# Allegro board ir_pcb_back-dvt-0514pm14.brd
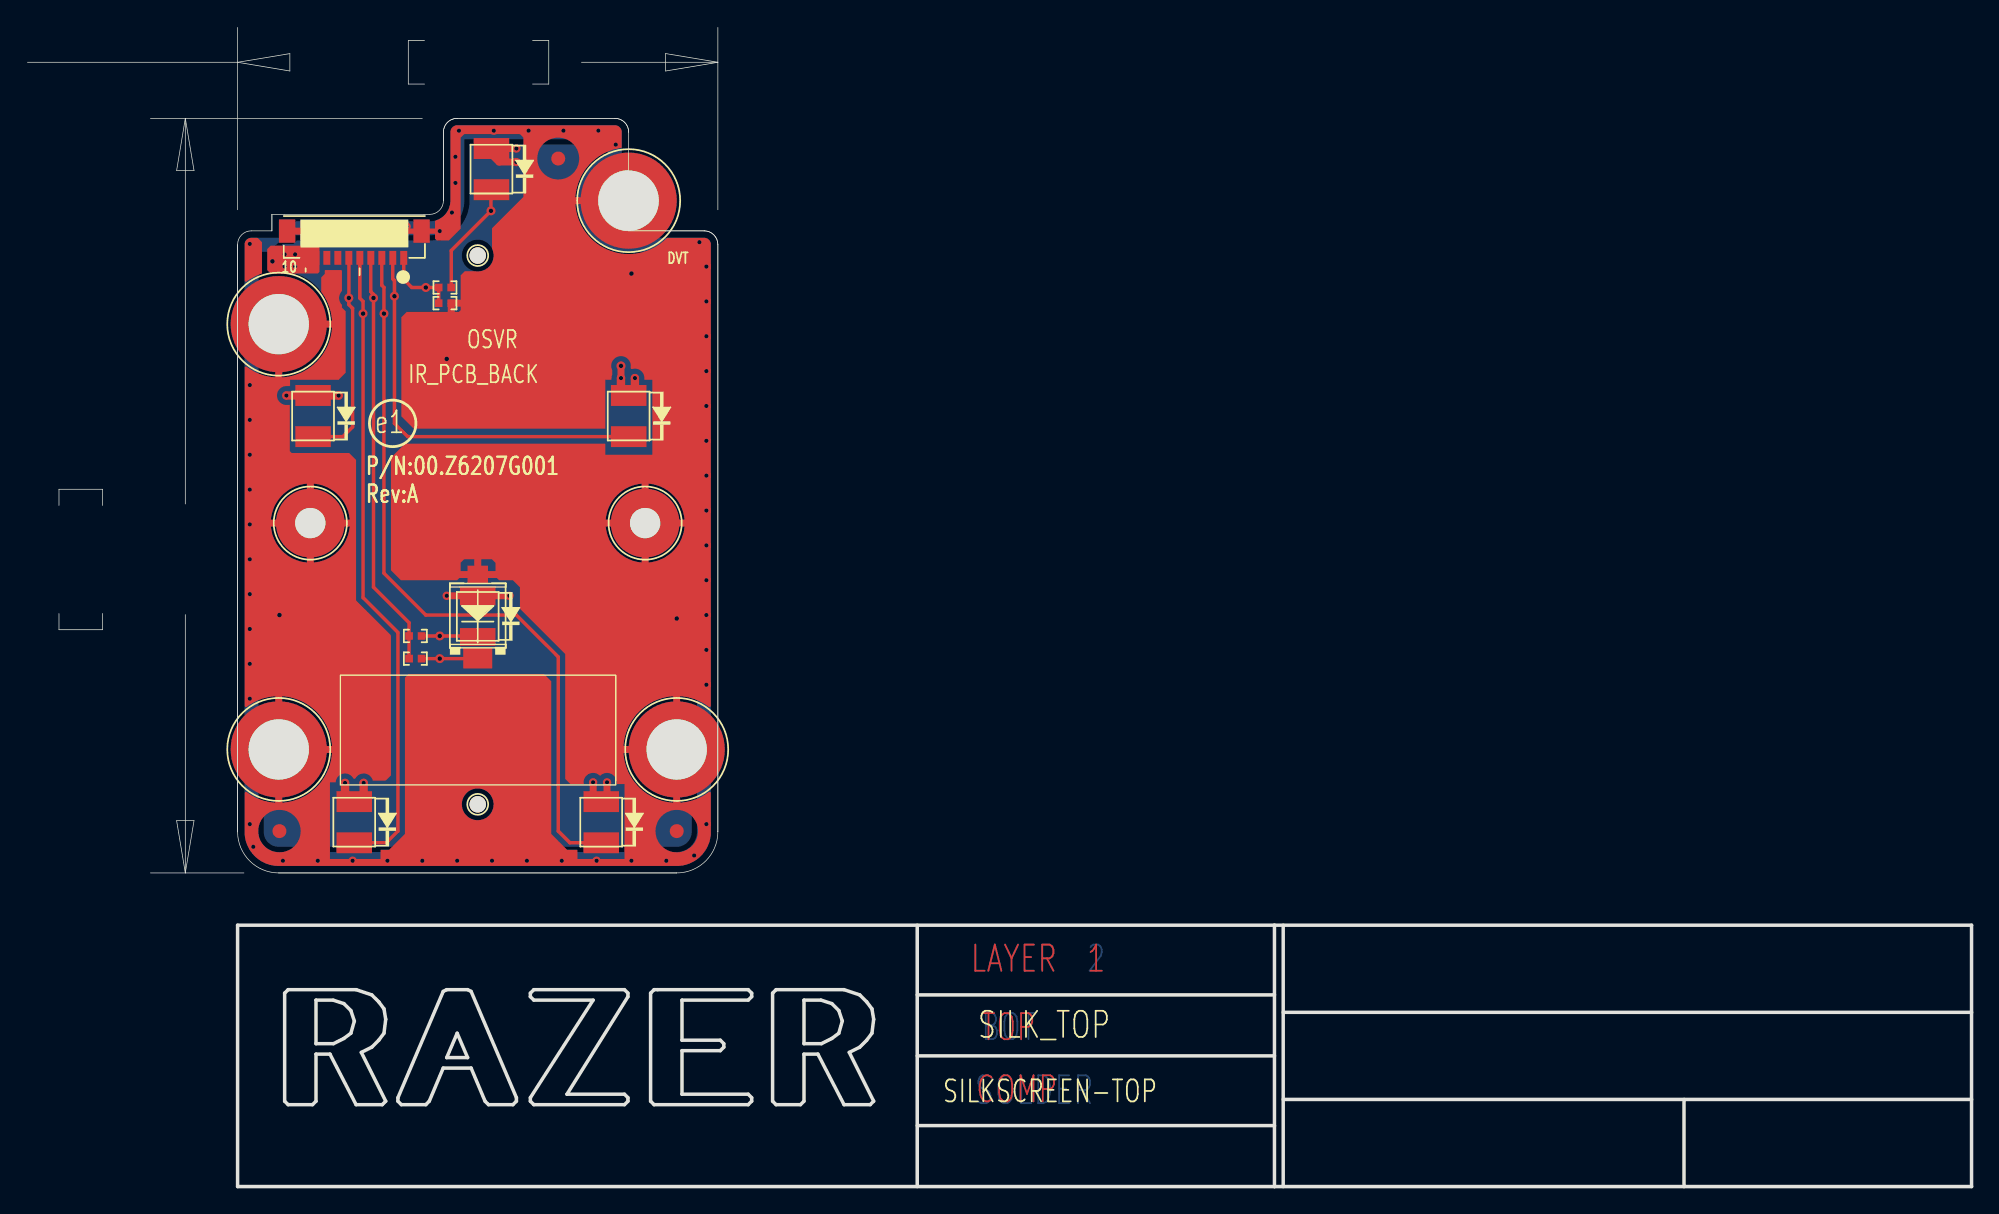
[diagram p0: board, top side]
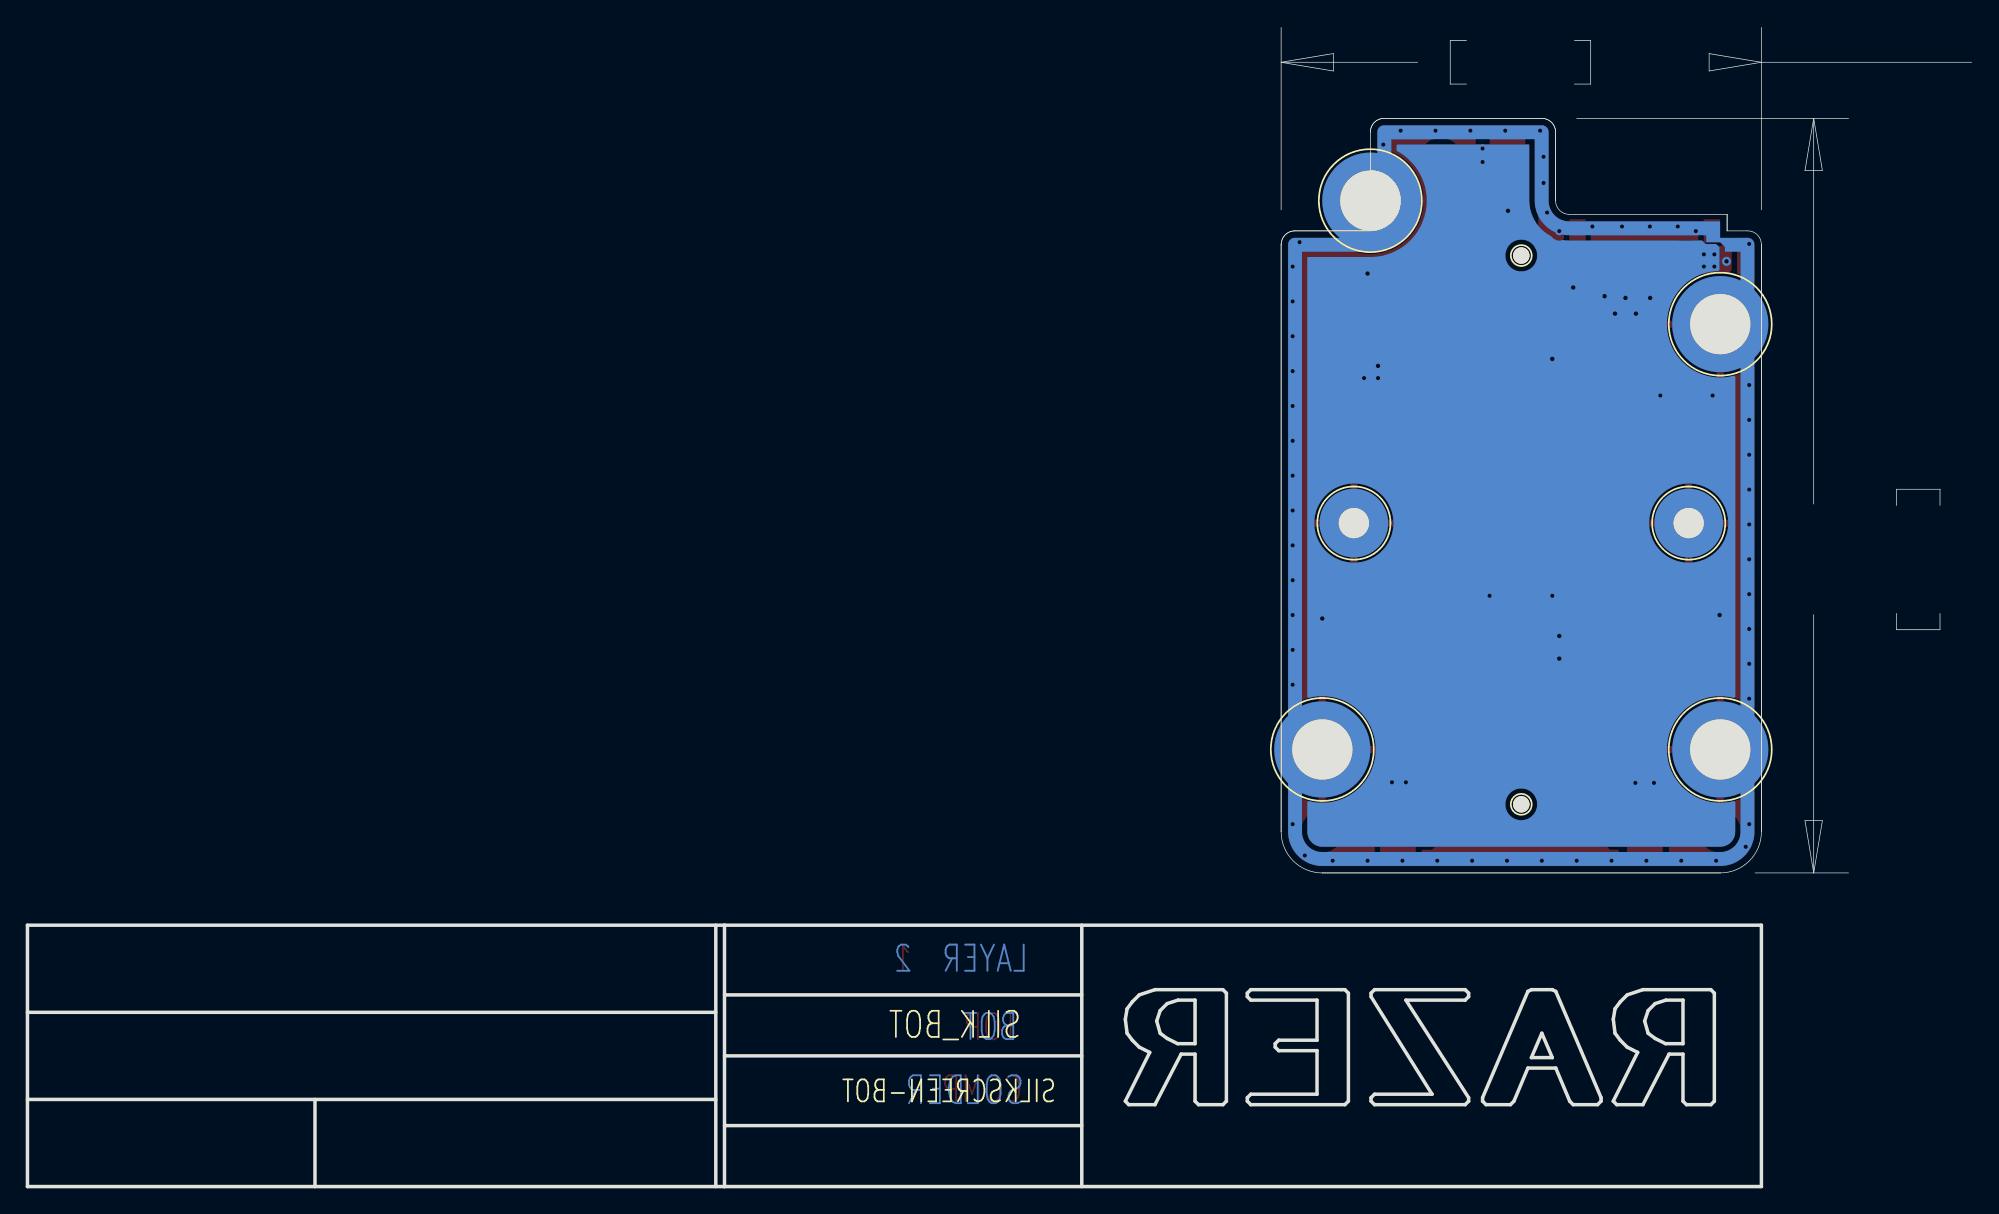
[diagram p1: board, bottom side, seen from below]

Outline 141.68 x 84.49 mm; copper layers: TOP, BOTTOM. Coordinates in mm from the lower left corner of the outline.
Outline path: 15.31,68.66 15.31,25.86 ; 15.31,68.66 arc(15.61,69.37) 16.31,69.66 17.81,69.66 ; 15.31,68.66 15.31,25.86 ; 15.31,25.86 arc(16.19,23.74) 18.31,22.86 ; 17.81,69.66 17.81,70.86 ; 17.81,69.66 17.81,70.86 ; 17.81,70.86 29.31,70.86 arc(30.02,71.15) 30.31,71.86 ; 18.31,22.86 47.31,22.86 ; 18.31,22.86 47.31,22.86 ; 47.31,22.86 arc(49.44,23.74) 50.31,25.86 ; 30.31,76.86 30.31,71.86 ; 30.31,76.86 arc(30.61,77.57) 31.31,77.86 ; 30.31,76.86 arc(30.61,77.57) 31.31,77.86 ; 30.31,76.86 30.31,71.86 ; 31.31,77.86 42.81,77.86 ; 31.31,77.86 42.81,77.86 ; 42.81,77.86 arc(43.52,77.57) 43.81,76.86 ; 42.81,77.86 arc(43.52,77.57) 43.81,76.86 ; 43.81,76.86 43.81,74.06 arc(41.61,71.86) 43.81,69.66 ; 43.81,69.66 49.31,69.66 ; 43.81,69.66 49.31,69.66 ; 49.31,69.66 arc(50.02,69.37) 50.31,68.66 ; 49.31,69.66 arc(50.02,69.37) 50.31,68.66 ; 50.31,68.66 50.31,25.86 ; 50.31,68.66 50.31,25.86

## Placement (name value [footprint] x y rotation side)
LED1  SFH 4253  [OSRAM_SFH4253]  33.81 74.16 0 top
LED2  SFH 4253  [OSRAM_SFH4253]  43.81 56.16 0 top
LED3  SFH 4253  [OSRAM_SFH4253]  41.81 26.56 0 top
LED4  SFH 4253  [OSRAM_SFH4253#2]  32.81 41.56 0 top
LED5  SFH 4253  [OSRAM_SFH4253]  23.81 26.56 0 top
LED6  SFH 4253  [OSRAM_SFH4253]  20.81 56.16 0 top
LED44  BPW34S-Z_NC  [BPW34S]  32.81 41.56 270 top
M1  HOLEC47040N_NPTH  [HOLEC47D47N]  32.82 67.86 0 top
M2  HOLEC47040N_NPTH  [HOLEC47D47N]  32.82 27.86 0 top
M3  HOLEC47040N_NPTH  [HOLEC197D87]  20.61 48.36 0 top
M4  HOLEC47040N_NPTH  [HOLEC197D87]  45.01 48.36 0 top
M5  HOLEC47040N_NPTH  [HOLEC276D173]  18.31 62.86 0 top
M6  HOLEC47040N_NPTH  [HOLEC276D173]  18.31 31.86 0 top
M7  HOLEC47040N_NPTH  [HOLEC276D173]  47.31 31.86 0 top
M8  HOLEC47040N_NPTH  [HOLEC276D173]  43.81 71.86 0 top
NOREF  -  []  15.31 0 0 top
NOREF#2  -  [unnamed#2]  47.32 25.91 0 top
NOREF#3  -  []  15.31 68.66 0 top
NOREF#4  -  [unnamed#2]  18.36 25.91 0 top
NOREF#5  -  []  18.31 22.86 90 top
NOREF#6  -  [unnamed#2]  38.68 74.93 0 top
P100  -  [ACES_88460-10]  23.82 67.69 180 top
PCB  TP_1mm  [TPC30T]  28.52 77.47 0 top
R401  0_NC  [R0402]  28.27 38.48 180 top
R402  0  [R0402]  28.27 40.13 180 top
R403  0  [R0402]  30.43 65.53 180 top
R404  0_NC  [R0402]  30.43 64.39 180 top

## Library data of the parts
LED1-LED6 = LED55BF/TO_3
LED44 = LED55BF/TO_1
M1-M8 = Mounting Hole
P100 = CON2_4
PCB = T POINT R
R401-R404 = R_RP_3

## Footprints (pads in the part's own frame, mm; a bottom-side part is the same pattern mirrored in y, then rotated)
ACES_88460-10
  rect 0.508x1.016 smd: 1(-3.6,0) 2(-2.8,0) 3(-2,0) 4(-1.2,0) 5(-0.4,0) 6(0.4,0) 7(1.2,0) 8(2,0) 9(2.8,0) 10(3.6,0)
  rect 1.194x1.702 smd: S1(4.9,-1.95) S2(-4.9,-1.95)
BPW34S
  rect 1.295x1.499 smd: A(-3.05,0)
  rect 1.499x2.108 smd: C(3.05,0)
HOLEC47D47N
  round 1.194 hole 1.194 unplated: (0,0)
HOLEC197D87
  round 5.004 hole 2.21: 1(0,0)
HOLEC276D173
  round 7.01 hole 4.394: 1(0,0)
OSRAM_SFH4253
  rect 2.591x1.524 smd: A(0,1.5) C(0,-1.5)
OSRAM_SFH4253#2
  custom 2.591x1.397 smd: A(0,1.5)
  custom 2.591x1.295 smd: C(0,-1.5)
R0402
  rect 0.559x0.559 smd: 1(-0.457,0) 2(0.457,0)
TPC30T
  round 0 smd: 1(0,0)
unnamed#2
  round 1.016 smd: 1(0,0)

## Nets
2.8V_IRB: LED1.A(ANODE) LED2.A(ANODE) LED3.A(ANODE) LED4.A(ANODE) LED5.A(ANODE) LED6.A(ANODE) P100.9 P100.10
DGND_IRB: LED44.A(ANODE) M3.1 M4.1 M5.1 M6.1 M7.1 M8.1 P100.S1 P100.S2 R404.1(L)
LED1: P100.1 R403.2(R) R404.2(R)
LED1_1: LED1.C(CATHODE) R403.1(L)
LED2: LED2.C(CATHODE) P100.2
LED3: LED3.C(CATHODE) P100.3
LED4: P100.4 R401.2(R) R402.2(R)
LED4_1: LED4.C(CATHODE) R402.1(L)
LED5: LED5.C(CATHODE) P100.5
LED6: LED6.C(CATHODE) P100.6
N15986635: LED44.C(CATHODE) R401.1(L)

Pads without a net: NOREF#2 1; NOREF#4 1; NOREF#6 1; P100 7 8; PCB 1

## Via types
v1: diameter 0.66, hole 0.33, TOP to BOTTOM, 15 vias
v2: diameter 0.61, hole 0.305, TOP to BOTTOM, 72 vias

## Routing (per net, layer and track width the routed paths; a pad name or vN(x,y) marks a point on that pad's centre or on a via; arc(x,y) is an arc through that point)
2.8V_IRB: length 23.6
  TOP w0.508: v2(41.22,29.46) 41.22,28.45 41.61,28.06 LED3.A 42.24,28.48 v2(42.24,29.46) ; v2(43.25,58.93) v1(43.25,59.82) ; v2(30.55,43.06) LED4.A v2(35.13,43.06) ; v2(35.63,74.68) 34.36,74.68 33.81,75.23 LED1.A v2(35.63,75.66)
  TOP w0.61: v2(24.5,29.42) 24.5,28.49 24.07,28.06 LED5.A 23.58,28.06 23.15,28.49 v2(23.15,29.42) ; v2(43.25,58.93) 43.25,58.04 43.63,57.66 LED2.A 43.89,57.66 44.27,58.04 v2(44.27,58.93) ; v2(18.87,57.66) 20.81,57.66 LED6.A 20.82,57.66 v2(22.68,57.66)
  vias: v1(17.85,67.44) v2(18.74,67.94) v2(18.74,67.06) v2(19.51,67.94) v2(19.51,67.06)
DGND_IRB: length 75.5
  TOP w0.381: v2(30.05,69.64) P100.S2 27.69,69.64
  TOP w0.508: M4.1 47.95,48.36 ; M4.1 45.01,45.43 ; M4.1 42.08,48.36 ; M4.1 45.01,51.29 ; LED44.A 34.52,44.61 34.62,44.7 ; LED44.A 31.16,44.61 31.06,44.7 ; LED44.A 32.81,45.95 32.84,45.97 ; M3.1 20.61,51.29 ; M3.1 23.55,48.36 ; M3.1 17.68,48.36 ; M3.1 20.61,45.43 ; 30.94,63.37 30.89,63.42 R404.1 32.08,64.39 ; P100.S1 v2(20.1,69.64) ; 43.38,31.86 M7.1 ; M7.1 47.31,35.8 ; M7.1 47.31,27.92 ; 18.31,58.92 M5.1 22.25,62.86 ; M8.1 38.92,71.86 38.17,71.12 ; 18.31,27.92 M6.1 ; M6.1 22.25,31.86 ; M6.1 18.31,35.8
  BOTTOM w0.508: M8.1 40.71,71.86 40.71,71.12
  vias: v1(18.36,41.66) v1(30.55,60.33) v1(44.02,66.55) v1(47.32,41.4) v2(16.2,68.71) v2(16.2,58.42) v2(16.2,55.88) v2(16.2,53.34) v2(16.2,50.8) v2(16.2,48.26) v2(16.2,45.72) v2(16.2,43.18) v2(16.2,40.64) v2(16.2,38.1) v2(16.2,35.56) v2(16.2,26.42) v2(16.46,24.77) v2(18.62,23.75) v2(21.16,23.75) v2(21.41,69.98) v2(23.44,69.98) v2(23.7,23.75) v2(25.47,69.98) v2(26.24,23.75) v2(27.63,69.98) v2(28.78,23.75) v2(30.94,70.99) v2(31.19,75.06) v2(31.19,73.15) v2(31.32,23.75) v2(31.44,76.96) v2(33.86,23.75) v2(33.98,76.96) v2(36.4,23.75) v2(36.52,76.96) v2(38.94,23.75) v2(39.06,76.96) v2(41.48,23.75) v2(41.6,76.96) v2(42.87,75.95) v2(44.02,23.75) v2(46.56,23.75) v2(48.59,24.13) v2(48.97,68.83) v2(49.48,67.06) v2(49.48,64.52) v2(49.48,61.98) v2(49.48,59.44) v2(49.48,56.9) v2(49.48,54.36) v2(49.48,51.82) v2(49.48,49.28) v2(49.48,46.74) v2(49.48,44.2) v2(49.48,41.66) v2(49.48,39.12) v2(49.48,36.58) v2(49.48,26.42)
LED1: length 5.5
  TOP w0.254: P100.1 27.42,66.12 28.01,65.53 v1(29.03,65.53) R403.2 R404.2
LED1_1: length 8.3
  TOP w0.254: R403.1 30.89,68.22 v1(33.78,71.12) 33.78,72.63 LED1.C
LED2: length 29.6
  TOP w0.254: LED2.C 27.71,54.66 26.74,55.63 v1(26.74,64.9) 26.74,66.04 26.62,66.16 P100.2
LED3: length 54.5
  TOP w0.254: P100.3 25.82,65.69 25.98,65.53 v1(25.98,63.63) 25.98,44.7 29.03,41.66 35.63,41.66 38.68,38.61 38.68,25.91 39.53,25.06 LED3.C
LED4: length 30.4
  TOP w0.254: R401.2 R402.2 27.81,41.1 25.22,43.69 v1(25.22,64.77) 25.22,65.02 25.02,65.22 P100.4
LED4_1: length 4.1
  TOP w0.254: R402.1 v1(30.05,40.13) 32.74,40.13 LED4.C
LED5: length 46.5
  TOP w0.254: LED5.C 26.15,25.06 27,25.91 27,40.39 24.46,42.93 v1(24.46,63.63) 24.46,64.52 24.22,64.75 P100.5
LED6: length 15.6
  TOP w0.254: LED6.C 22.98,54.66 23.7,55.37 23.7,64.01 23.42,64.28 v1(23.42,64.77) P100.6
N15986635: length 4.1
  TOP w0.254: R401.1 v1(30.05,38.48) 32.79,38.48 LED44.C

## Copper pours and planes (outline as drawn; the poured copper is in the pictures)
2.8V_IRB on TOP (solid shape): 21.28,68.45 21.28,66.67 21.16,66.55 17.73,66.55 17.47,66.8 17.47,68.33 17.73,68.58 21.16,68.58
2.8V_IRB on BOTTOM (solid shape): outline of 833 points within 17.22,24.76 48.41,75.96
DGND_IRB on TOP (solid shape): outline of 1445 points within 15.82,23.37 49.81,77.35
DGND_IRB on BOTTOM (solid shape): outline of 358 points within 15.82,23.37 49.81,77.35
DGND_IRB on TOP (solid shape): 27.69,70.35 27.73,70.34 27.75,70.3 27.75,68.63 27.73,68.6 27.69,68.58 21.69,68.58 21.31,68.96 19.95,68.96 19.92,68.98 19.9,69.01 19.9,70.3 19.92,70.34 19.95,70.35
DGND_IRB on TOP (solid shape): 17.09,68.83 17.09,68.48 17.09,66.64 17.09,66.55 17.09,66.55 16.51,66.3 15.99,65.97 15.88,65.96 15.82,66.05 15.82,68.66 15.97,69.01 16.31,69.15 16.77,69.15

## Text on the board
Ref Des/Silkscreen Top: DVT | P/N:00.Z6207G001 | Rev:A | IR_PCB_BACK | OSVR | e1
NCLEGEND-1-2: FIGURE | SIZE | 12.0 | 87.0 | 173.0 | 47.0 | DRILL CHART: TOP to BOTTOM | ALL UNITS ARE IN MILS | PLATED | NON-PLATED | QTY | 72 | 2 | 4
